# Allegro board u-board-dvt-0513.brd
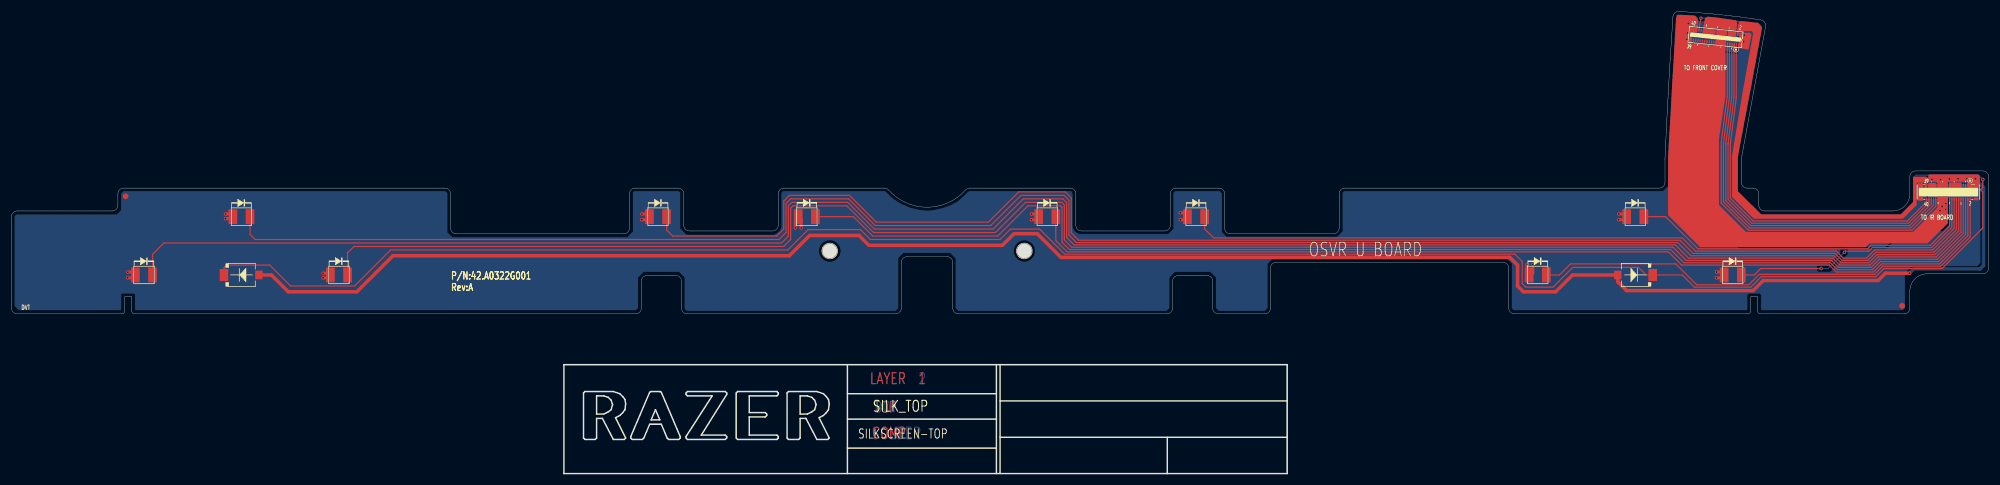
[diagram p0: board, top side]
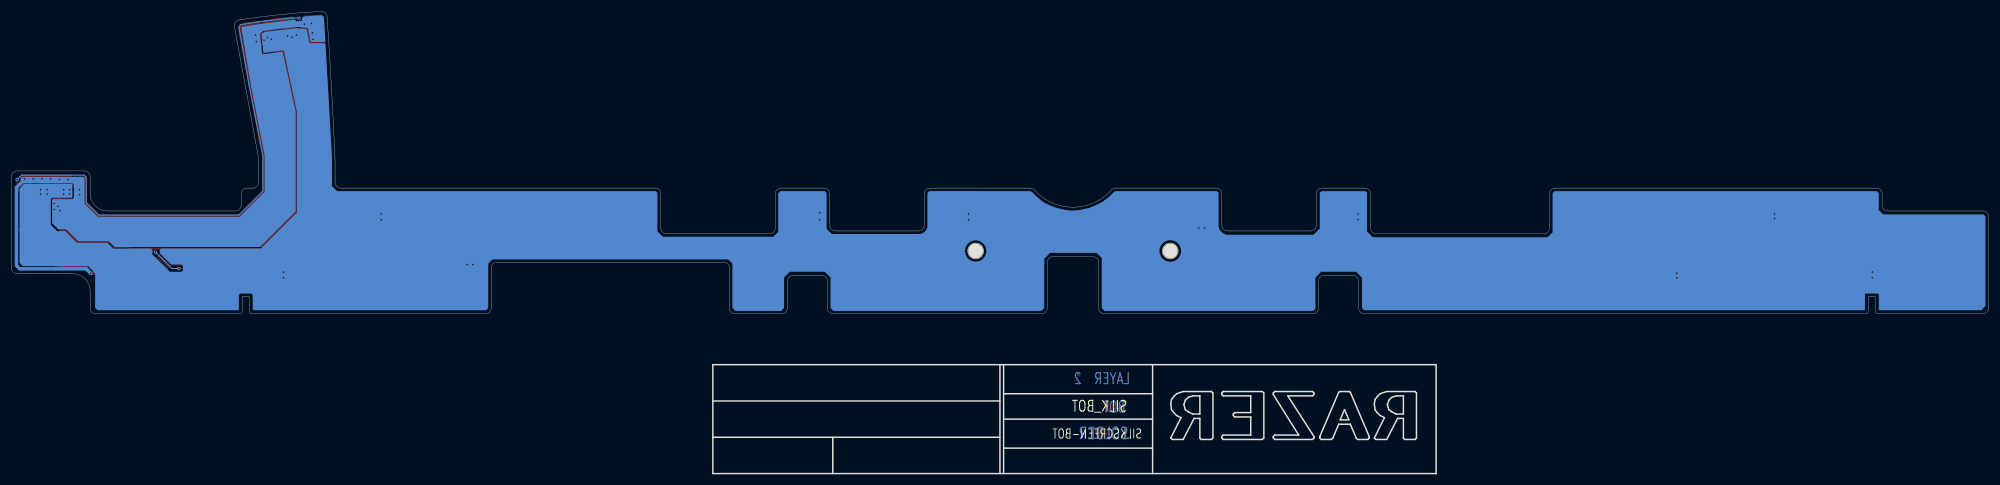
[diagram p1: board, bottom side, seen from below]

Outline 345.43 x 80.84 mm; copper layers: TOP, BOTTOM. Coordinates in mm from the lower left corner of the outline.
Outline path: 0,44.94 0,28.94 arc(0.29,28.23) 1,27.94 19.3,27.94 arc(19.65,28.09) 19.8,28.44 19.8,30.94 21,30.94 21,28.44 arc(21.15,28.09) 21.5,27.94 109.06,27.94 arc(109.76,28.23) 110.06,28.94 110.06,33.65 arc(110.35,34.36) 111.06,34.65 116.07,34.65 arc(116.77,34.36) 117.07,33.65 117.07,28.94 arc(117.36,28.23) 118.07,27.94 154.47,27.94 arc(155.17,28.23) 155.47,28.94 155.47,36.94 arc(155.76,37.65) 156.47,37.94 163.47,37.94 arc(164.17,37.65) 164.47,36.94 164.47,28.94 arc(164.76,28.23) 165.47,27.94 201.87,27.94 arc(202.57,28.23) 202.87,28.94 202.87,33.65 arc(203.16,34.36) 203.87,34.65 208.88,34.65 arc(209.58,34.36) 209.88,33.65 209.88,28.94 arc(210.17,28.23) 210.88,27.94 218.97,27.94 arc(219.67,28.23) 219.97,28.94 219.97,35.94 arc(220.26,36.65) 220.97,36.94 260.61,36.94 arc(261.31,36.65) 261.61,35.94 261.61,28.94 arc(261.9,28.23) 262.61,27.94 303.38,27.94 arc(303.73,28.09) 303.88,28.44 303.88,30.94 305.08,30.94 305.08,28.44 arc(305.22,28.09) 305.58,27.94 330.68,27.94 arc(331.39,28.23) 331.68,28.94 331.68,31.94 arc(332.56,34.06) 334.68,34.94 344.43,34.94 arc(345.13,35.23) 345.43,35.94 345.43,51.94 arc(345.13,52.65) 344.43,52.94 332.68,52.94 arc(331.97,52.65) 331.68,51.94 331.68,48.94 arc(330.8,46.82) 328.68,45.94 306.29,45.94 arc(305.58,46.23) 305.29,46.94 305.29,48.94 arc(304.99,49.65) 304.29,49.94 303.24,49.94 arc(302.54,50.23) 302.25,50.94 302.25,55.04 302.34,55.66 306.47,78.19 arc(306.3,78.95) 305.64,79.36 arc(298.51,80.28) 291.34,80.84 arc(290.62,80.59) 290.29,79.91 arc(289.53,67.79) 288.92,55.66 288.89,55.04 288.89,50.94 arc(288.6,50.23) 287.89,49.94 232.97,49.94 arc(232.26,49.65) 231.97,48.94 231.97,42.94 arc(231.67,42.23) 230.97,41.94 212.97,41.94 arc(212.26,42.23) 211.97,42.94 211.97,48.94 arc(211.67,49.65) 210.97,49.94 203.47,49.94 arc(202.76,49.65) 202.47,48.94 202.47,43.44 arc(202.17,42.73) 201.47,42.44 186.97,42.44 arc(186.26,42.73) 185.97,43.44 185.97,48.94 arc(185.67,49.65) 184.97,49.94 167.43,49.94 arc(167.03,49.85) 166.69,49.6 arc(159.97,46.59) 153.24,49.6 arc(152.91,49.85) 152.5,49.94 134.97,49.94 arc(134.26,49.65) 133.97,48.94 133.97,43.44 arc(133.67,42.73) 132.97,42.44 118.47,42.44 arc(117.76,42.73) 117.47,43.44 117.47,48.94 arc(117.17,49.65) 116.47,49.94 108.97,49.94 arc(108.26,49.65) 107.97,48.94 107.97,42.94 arc(107.67,42.23) 106.97,41.94 77.72,41.94 arc(77.02,42.23) 76.73,42.94 76.73,48.94 arc(76.43,49.65) 75.73,49.94 19.6,49.94 arc(18.89,49.65) 18.6,48.94 18.6,46.94 arc(18.31,46.23) 17.6,45.94 1,45.94 arc(0.29,45.65) 0,44.94

## Placement (name value [footprint] x y rotation side)
FPC  TP_1mm  [TPC30T]  125.6 45.72 0 top
LED7  SFH 4253  [OSRAM_SFH4253]  283.7 44.94 90 top
LED8  SFH 4253  [OSRAM_SFH4253]  300.73 34.74 90 top
LED9  SFH 4253  [OSRAM_SFH4253]  206.97 44.94 90 top
LED10  SFH 4253  [OSRAM_SFH4253]  112.97 44.94 90 top
LED11  SFH 4253  [OSRAM_SFH4253]  40.18 44.94 90 top
LED12  SFH 4253  [OSRAM_SFH4253]  23.15 34.74 90 top
LED13  SFH 4253  [OSRAM_SFH4253]  57.22 34.74 90 top
LED14  SFH 4253  [OSRAM_SFH4253]  138.97 44.94 90 top
LED15  SFH 4253  [OSRAM_SFH4253]  180.97 44.94 90 top
LED16  SFH 4253  [OSRAM_SFH4253]  266.67 34.74 90 top
LED42  BPW34S-Z  [BPW34S]  283.7 34.74 0 top
LED43  BPW34S-Z  [BPW34S]  40.18 34.74 180 top
M1  HOLEC47040N_NPTH  [HOLEC98D98N]  176.97 38.94 0 top
M2  HOLEC47040N_NPTH  [HOLEC98D98N]  142.97 38.94 0 top
NOREF  -  [unnamed]  19.94 48.51 0 top
NOREF#2  -  [#2]  96.52 0 0 top
NOREF#3  -  [unnamed]  330.33 29.34 0 top
P200  JAE-WP7B-S040VA1  [JAE_WP7B-SXXXVA1]  338.41 49.25 0 top
P201  JAE-WP7B-P040VA1  [JAE_WP7B-PXXXVA1]  297.72 76.36 174 top

## Library data of the parts
FPC = T POINT R
LED7-LED16 = LED55BF/TO_3
LED42 LED43 = LED55BF/TO_1
M1 M2 = Mounting Hole
P200 P201 = CON34_0

## Footprints (pads in the part's own frame, mm; a bottom-side part is the same pattern mirrored in y, then rotated)
BPW34S
  rect 1.295x1.499 smd: A(-3.05,0)
  rect 1.499x2.108 smd: C(3.05,0)
HOLEC98D98N
  round 2.489 hole 2.489 unplated: (0,0)
JAE_WP7B-PXXXVA1
  rect 0.229x0.533 smd: 1(-3.8,0.925) 2(-3.8,-0.925) 3(-3.4,0.925) 4(-3.4,-0.925) 5(-3,0.925) 6(-3,-0.925) 7(-2.6,0.925) 8(-2.6,-0.925) 9(-2.2,0.925) 10(-2.2,-0.925) 11(-1.8,0.925) 12(-1.8,-0.925) 13(-1.4,0.925) 14(-1.4,-0.925) 15(-1,0.925) 16(-1,-0.925) 17(-0.6,0.925) 18(-0.6,-0.925) 19(-0.2,0.925) 20(-0.2,-0.925) 21(0.2,0.925) 22(0.2,-0.925) 23(0.6,0.925) 24(0.6,-0.925) 25(1,0.925) 26(1,-0.925) 27(1.4,0.925) 28(1.4,-0.925) 29(1.8,0.925) 30(1.8,-0.925) 31(2.2,0.925) 32(2.2,-0.925) 33(2.6,0.925) 34(2.6,-0.925) 35(3,0.925) 36(3,-0.925) 37(3.4,0.925) 38(3.4,-0.925) 39(3.8,0.925) 40(3.8,-0.925) S1(-4.2,0.925) S2(-4.2,-0.925) S3(4.2,0.925) S4(4.2,-0.925)
JAE_WP7B-SXXXVA1
  rect 0.229x0.533 smd: 1(3.8,1.2) 2(3.8,-1.2) 3(3.4,1.2) 4(3.4,-1.2) 5(3,1.2) 6(3,-1.2) 7(2.6,1.2) 8(2.6,-1.2) 9(2.2,1.2) 10(2.2,-1.2) 11(1.8,1.2) 12(1.8,-1.2) 13(1.4,1.2) 14(1.4,-1.2) 15(1,1.2) 16(1,-1.2) 17(0.6,1.2) 18(0.6,-1.2) 19(0.2,1.2) 20(0.2,-1.2) 21(-0.2,1.2) 22(-0.2,-1.2) 23(-0.6,1.2) 24(-0.6,-1.2) 25(-1,1.2) 26(-1,-1.2) 27(-1.4,1.2) 28(-1.4,-1.2) 29(-1.8,1.2) 30(-1.8,-1.2) 31(-2.2,1.2) 32(-2.2,-1.2) 33(-2.6,1.2) 34(-2.6,-1.2) 35(-3,1.2) 36(-3,-1.2) 37(-3.4,1.2) 38(-3.4,-1.2) 39(-3.8,1.2) 40(-3.8,-1.2)
  rect 0.762x0.508 smd: S1(-4.85,1.2) S2(-4.85,-1.2) S3(4.85,1.2) S4(4.85,-1.2)
OSRAM_SFH4253
  rect 2.591x1.524 smd: A(0,1.5) C(0,-1.5)
TPC30T
  round 0 smd: 1(0,0)
unnamed
  round 1.016 smd: 1(0,0)

## Nets
2.8V_FPC_U: LED7.A(ANODE) LED8.A(ANODE) LED9.A(ANODE) LED10.A(ANODE) LED11.A(ANODE) LED12.A(ANODE) LED13.A(ANODE) LED14.A(ANODE) LED15.A(ANODE) LED16.A(ANODE) P200.9 P200.11 P200.13 P200.15 P200.17 P200.19 P200.31 P200.33 P200.35 P200.37 P201.4 P201.6 P201.8 P201.10 P201.22 P201.24 P201.26 P201.28 P201.30 P201.32
3.3V_FPC_U: P200.39 P201.2
DGND_FPC_U: LED42.A(ANODE) LED43.A(ANODE) P200.1 P200.3 P200.21 P200.22 P200.23 P200.24 P200.25 P200.26 P200.27 P200.28 P200.29 P200.30 P200.S1 P200.S2 P200.S3 P201.11 P201.12 P201.13 P201.14 P201.15 P201.16 P201.17 P201.18 P201.19 P201.20 P201.38 P201.40 P201.S1 P201.S2 P201.S3 P201.S4
DRVCLK_FPC_U: P200.36 P201.5
IR_LED_IN_U: LED42.C(CATHODE) LED43.C(CATHODE) P200.5 P201.36
LATEN_FPC_U: P200.40 P201.1
LED7: LED7.C(CATHODE) P200.20
LED8: LED8.C(CATHODE) P200.18
LED9: LED9.C(CATHODE) P200.16
LED10: LED10.C(CATHODE) P200.14
LED11: LED11.C(CATHODE) P200.12
LED12: LED12.C(CATHODE) P200.10
LED13: LED13.C(CATHODE) P200.8
LED14: LED14.C(CATHODE) P200.6
LED15: LED15.C(CATHODE) P200.4
LED16: LED16.C(CATHODE) P200.2
OUTEN_FPC_U: P200.38 P201.3
SDI_FPC_U: P200.34 P201.7
SDO_FPC_U: P200.32 P201.9

Pads without a net: FPC 1; NOREF 1; NOREF#3 1; P200 7 S4; P201 21 23 25 27 29 31 33 34 35 37 39

## Via types
v1: diameter 0.61, hole 0.305, TOP to BOTTOM, 57 vias

## Routing (per net, layer and track width the routed paths; a pad name or vN(x,y) marks a point on that pad's centre or on a via; arc(x,y) is an arc through that point)
2.8V_FPC_U: length 32.8
  TOP w0.508: v1(20.32,34.24) 21.15,34.24 LED12.A 21.14,35.26 v1(20.32,35.26) ; v1(280.82,45.42) 281.72,45.42 LED7.A 281.66,44.4 v1(280.82,44.4) ; v1(37.39,45.42) 38.21,45.42 LED11.A 38.35,44.6 v1(37.39,44.6) ; v1(265.81,36.58) 265.81,35.05 265.5,34.74 LED16.A 264.8,35.11 v1(264.8,36.58) ; v1(110.13,44.4) 110.92,44.4 LED10.A 110.99,45.42 v1(110.13,45.42) ; v1(204.22,45.62) 204.79,45.62 LED9.A 204.92,44.4 v1(204.22,44.4) ; v1(297.89,35.26) 298.72,35.26 LED8.A 298.73,34.24 v1(297.89,34.24) ; v1(178.21,44.4) 178.92,44.4 LED15.A 178.99,45.42 v1(178.21,45.42) ; v1(136.96,42.98) 136.96,44.43 LED14.A 137.97,44.43 v1(137.97,42.98) ; v1(54.46,34.24) 55.21,34.24 LED13.A 55.4,35.05 v1(54.46,35.05)
  vias: v1(295.66,76.71) v1(296.42,76.33) v1(297.18,76.58) v1(300,75.98) v1(300.69,76.26) v1(301.3,75.82) v1(335.28,49.66) v1(335.28,48.89) v1(336.3,49.66) v1(336.3,48.89) v1(339.22,49.66) v1(339.22,48.89) v1(340.36,49.66) v1(340.36,48.89)
3.3V_FPC_U: length 4.2
  TOP w0.203: P200.39 334.61,50.83 334.39,51.05 332.74,51.05 332.61,50.93
  TOP w0.229: P201.2 301.7,77.85 302.39,77.85
DGND_FPC_U: length 334.8
  TOP w0.61: v1(331.6,35.05) 327.41,35.05 326.14,33.78 306.07,33.78 304.29,32 282.2,32 280.65,33.56 LED42.A 272.74,34.74 269.8,31.8 264.16,31.8 263.14,32.82 263.14,36.47 261.8,37.82 183.36,37.82 179.22,41.96 175.16,41.96 173.13,39.93 149.81,39.93 148.08,41.66 139.45,41.66 135.89,38.1 66.65,38.1 60.35,31.8 48.36,31.8 45.42,34.74 LED43.A
  BOTTOM w0.61: 343.28,51.31 344.55,50.04 344.55,36.4 343.97,35.81 332.36,35.81 v1(331.6,35.05)
  vias: v1(292.74,75.95) v1(292.86,77.09) v1(292.99,78.74) v1(294.26,78.61) v1(302.64,75.56) v1(302.77,76.71) v1(333.5,49.66) v1(333.5,48.77) v1(335.53,51.44) v1(336.93,45.97) v1(337.06,51.44) v1(337.31,46.74) v1(337.95,47.24) v1(337.95,46.23) v1(338.58,51.56) v1(340.11,51.56) v1(341.63,51.56) v1(343.15,51.56)
DRVCLK_FPC_U: length 67.6
  TOP w0.203: P200.36 335.41,47.17 331.62,43.38 303.89,43.38 299.51,47.76 299.51,57.49 299.52,57.74 300.56,65.85 300.56,74.63 P201.5
IR_LED_IN_U: length 434
  TOP w0.203: P201.36 294.89,78.08 v1(295.18,79.67) ; 344.04,49.66 344.42,50.04 v1(344.42,51.44) ; 344.04,49.66 344.42,49.28 344.42,42.98 337.31,35.86 327.15,35.86 325.73,34.44 305.71,34.44 303.89,32.61 294.03,32.61 291.9,34.74 LED42.C 285.6,34.74 284.28,36.07 272.8,36.07 269.34,32.61 264.57,32.61 263.96,33.22 263.96,37.08 262.66,38.38 184.02,38.38 179.63,42.77 174.55,42.77 172.72,40.94 150.06,40.94 148.34,42.67 139.19,42.67 135.64,39.12 66.24,39.12 59.94,32.82 48.77,32.82 45.11,36.47 37.59,36.47 37.13,36.02 LED43.C ; 344.04,49.66 341.63,49.66 341.41,49.88 P200.5
  BOTTOM w0.203: v1(295.18,79.67) 296.45,79.69 296.83,79.67 302.29,79.03 304.58,78.65 305.44,78.49 305.69,78.11 303.91,67.95 301.5,55.63 301.5,49.4 305.69,45.21 330.2,45.21 332.36,47.37 332.36,51.82 332.74,52.2 343.66,52.2 v1(344.42,51.44)
LATEN_FPC_U: length 64.8
  TOP w0.203: P200.40 334.61,47.56 331.25,44.2 304.29,44.2 300.31,48.18 300.31,57.63 300.31,57.63 301.35,65.8 301.35,74.55 P201.1
LED7: length 62.1
  TOP w0.203: P200.20 338.61,43.28 335.25,39.93 324.92,39.93 324.31,39.32 294.64,39.32 289.02,44.94 LED7.C
LED8: length 45.2
  TOP w0.203: P200.18 339.01,43.08 335.46,39.52 325.12,39.52 324.51,38.91 320.45,38.91 v1(320.24,38.71) ; LED8.C 304.49,34.74 305.61,35.86 v1(316.18,35.86)
  BOTTOM w0.203: v1(320.24,38.71) 317.4,35.86 v1(316.18,35.86)
LED9: length 142.5
  TOP w0.203: P200.16 339.41,42.87 335.66,39.12 325.53,39.12 324.1,37.69 320.04,37.69 318.82,38.91 294.23,38.91 291.92,41.22 210.03,41.22 208.47,42.79 LED9.C
LED10: length 254.2
  TOP w0.203: P200.14 339.81,42.66 335.86,38.71 325.73,38.71 324.31,37.29 319.84,37.29 318.62,38.51 293.83,38.51 291.52,40.82 186.46,40.82 185.17,42.11 185.17,48.21 184.1,49.28 175.97,49.28 170.69,43.99 151.08,43.99 146.41,48.67 135.94,48.67 134.93,47.65 134.93,42.77 133.71,41.55 115.52,41.55 114.47,42.61 LED10.C
LED11: length 328.4
  TOP w0.203: P200.12 340.21,42.45 336.07,38.3 325.93,38.3 324.51,36.88 319.63,36.88 318.41,38.1 293.42,38.1 291.11,40.41 186.06,40.41 184.76,41.71 184.76,47.8 183.9,48.67 176.38,48.67 171.09,43.38 150.93,43.38 146.25,48.06 136.14,48.06 135.33,47.24 135.33,42.16 134.11,40.94 42.57,40.94 41.68,41.83 LED11.C
LED12: length 347.1
  TOP w0.203: P200.10 340.61,42.24 336.27,37.9 326.14,37.9 324.71,36.47 319.43,36.47 318.21,37.69 293.01,37.69 290.7,40.01 185.65,40.01 184.35,41.3 184.35,47.4 183.69,48.06 176.78,48.06 171.5,42.77 150.77,42.77 146.1,47.45 136.35,47.45 135.74,46.84 135.74,41.55 134.52,40.34 26.62,40.34 24.65,38.37 LED12.C
LED13: length 313.7
  TOP w0.203: LED13.C 58.72,38.6 59.84,39.73 134.93,39.73 136.14,40.94 136.14,46.43 136.55,46.84 145.95,46.84 150.62,42.16 171.91,42.16 177.19,47.45 183.49,47.45 183.95,46.99 183.95,40.89 185.24,39.6 290.3,39.6 292.61,37.29 318.01,37.29 319.23,36.07 324.92,36.07 326.34,37.49 336.47,37.49 341.01,42.03 P200.8
LED14: length 221.5
  TOP w0.203: P200.6 341.41,41.82 336.68,37.08 326.54,37.08 325.12,35.66 319.02,35.66 317.81,36.88 292.2,36.88 289.89,39.19 184.84,39.19 183.54,40.49 183.54,46.58 183.29,46.84 177.6,46.84 172.31,41.55 150.47,41.55 147.08,44.94 LED14.C
LED15: length 174.9
  TOP w0.203: P200.4 341.81,41.61 336.88,36.68 326.75,36.68 325.32,35.26 318.82,35.26 317.6,36.47 291.8,36.47 289.48,38.79 184.43,38.79 182.47,40.75 LED15.C
LED16: length 86.5
  TOP w0.203: LED16.C 270.45,34.74 272.39,36.68 290.78,36.68 294.44,33.02 303.53,33.02 305.36,34.85 325.53,34.85 326.95,36.27 337.08,36.27 342.21,41.4 P200.2
OUTEN_FPC_U: length 66.2
  TOP w0.203: P201.3 300.95,74.59 300.95,65.82 299.91,57.68 299.91,57.68 299.91,47.97 304.09,43.79 331.42,43.79 335.01,47.38 P200.38
SDI_FPC_U: length 69
  TOP w0.203: P200.34 335.81,46.96 331.83,42.98 303.68,42.98 299.11,47.55 299.11,57.48 299.12,57.79 300.16,65.87 300.16,74.67 300.16,74.67 P201.7
SDO_FPC_U: length 70.4
  TOP w0.203: P200.32 336.21,46.75 332.03,42.57 303.48,42.57 298.71,47.34 298.71,57.2 298.73,57.96 299.76,65.9 299.76,74.71 P201.9

## Copper pours and planes (outline as drawn; the poured copper is in the pictures)
2.8V_FPC_U on TOP (solid shape): 336.32,50.72 336.32,50.14 336.73,49.73 336.73,48.82 336.42,48.51 335,48.51 334.9,48.62 334.9,50.72 335,50.83 336.22,50.83
2.8V_FPC_U on TOP (solid shape): 340.72,50.83 340.72,48.64 340.64,48.56 338.96,48.56 338.89,48.64 338.89,49.78 338.51,50.17 338.51,50.85 338.58,50.93 340.61,50.93
2.8V_FPC_U on TOP (solid shape): 297.85,79.79 301.27,79.29 301.53,79.03 301.35,77.32 301.29,76.64 301.27,76.5 301.28,76.49 301.53,76.11 301.53,75.62 301.42,75.54 301.28,75.54 299.75,75.7 299.64,75.85 299.75,76.49 299.84,76.6 299.86,76.73 299.87,76.81 299.93,77.38 299.92,77.39 299.75,77.66 298.12,77.91 298,77.94 297.79,77.74 297.78,77.73 297.7,77 297.61,76.02 297.52,75.93 297.08,75.98 296.37,76.02 296.21,76.06 295.63,76.26 295.2,76.52 295.2,76.81 295.4,77.09 295.47,77.16 295.49,77.25 295.55,77.84 295.56,77.89 295.9,79.71 296.32,79.92 296.45,79.92
2.8V_FPC_U on BOTTOM (solid shape): 299.74,77.45 299.94,77.41 301.01,77.28 301.27,77.25 301.69,76.94 301.75,76.91 301.75,76.9 301.78,76.87 301.66,75.73 301.4,73.65 301.36,73.61 301.27,73.61 301.03,73.63 297.92,74.04 297.87,74.02 297.84,73.96 295.58,63.42 295.53,63.22 295.53,45.72 301.88,39.37 319.28,39.37 319.53,39.12 319.53,38.61 317.5,36.58 315.72,36.58 315.47,36.32 315.47,35.56 315.72,35.31 317.75,35.31 320.8,38.35 320.8,39.12 321.06,39.37 327.66,39.37 328.68,40.39 334.01,40.39 336.04,42.42 337.44,42.42 338.58,43.56 338.58,48.01 338.33,48.26 334.9,48.26 334.77,48.39 334.77,50.55 334.9,50.67 343.21,50.67 344.02,49.86 344.02,36.88 343.41,36.27 332.03,36.27 330.81,35.05 330.81,28.98 330.4,28.58 305.82,28.58 305.69,28.7 305.69,31.24 305.44,31.5 303.53,31.5 303.28,31.24 303.28,28.7 303.15,28.58 262.51,28.58 262.13,28.96 262.13,36.7 261.37,37.47 220.22,37.47 219.46,36.7 219.46,28.96 218.95,28.45 210.95,28.45 210.44,28.96 210.44,34.29 209.42,35.31 203.33,35.31 202.31,34.29 202.31,28.96 201.8,28.45 165.48,28.45 164.97,28.96 164.97,37.59 163.96,38.61 155.83,38.61 154.94,37.72 154.94,28.96 154.43,28.45 118.08,28.45 117.94,28.49 117.64,28.79 117.6,28.91 117.6,34.29 116.59,35.31 110.49,35.31 109.47,34.29 109.47,28.96 109.09,28.58 21.72,28.58 21.59,28.7 21.59,31.37 21.46,31.5 19.3,31.5 19.18,31.37 19.18,28.7 19.05,28.58 1.27,28.58 0.53,29.31 0.53,39 141.09,39 141.09,38.87 141.1,38.75 141.11,38.63 141.14,38.51 141.17,38.39 141.21,38.27 141.25,38.16 141.31,38.05 141.37,37.94 141.44,37.84 141.51,37.74 141.59,37.65 141.68,37.56 141.77,37.48 141.87,37.41 141.97,37.34 142.08,37.28 142.19,37.22 142.3,37.18 142.42,37.14 142.54,37.11 142.66,37.08 142.78,37.07 142.91,37.06 143.03,37.06 143.15,37.07 143.27,37.08 143.39,37.11 143.51,37.14 143.63,37.18 143.74,37.22 143.85,37.28 143.96,37.34 144.06,37.41 144.16,37.48 144.25,37.56 144.34,37.65 144.42,37.74 144.5,37.84 144.56,37.94 144.63,38.05 144.68,38.16 144.73,38.27 144.77,38.39 144.8,38.51 144.82,38.63 144.84,38.75 144.85,38.87 144.85,39 175.11,39 175.11,38.88 175.12,38.75 175.14,38.63 175.16,38.52 175.19,38.4 175.23,38.28 175.28,38.17 175.33,38.06 175.39,37.96 175.46,37.86 175.53,37.76 175.61,37.67 175.7,37.58 175.79,37.5 175.89,37.43 175.99,37.36 176.09,37.3 176.2,37.25 176.31,37.2 176.43,37.16 176.55,37.13 176.67,37.11 176.79,37.09 176.91,37.08 177.03,37.08 177.15,37.09 177.27,37.11 177.39,37.13 177.5,37.16 177.62,37.2 177.73,37.25 177.84,37.3 177.95,37.36 178.05,37.43 178.14,37.5 178.23,37.58 178.32,37.67 178.4,37.76 178.47,37.86 178.54,37.96 178.6,38.06 178.65,38.17 178.7,38.28 178.74,38.4 178.77,38.52 178.8,38.63 178.81,38.75 178.82,38.88 178.82,39 178.81,39.12 178.8,39.24 178.77,39.36 178.74,39.47 178.7,39.59 178.65,39.7 178.6,39.81 178.54,39.91 178.47,40.02 178.4,40.11 178.32,40.2 178.23,40.29 178.14,40.37 178.05,40.44 177.95,40.51 177.84,40.57 177.73,40.62 177.62,40.67 177.5,40.71 177.39,40.74 177.27,40.76 177.15,40.78 177.03,40.79 176.91,40.79 176.79,40.78 176.67,40.76 176.55,40.74 176.43,40.71 176.31,40.67 176.2,40.62 176.09,40.57 175.99,40.51 175.89,40.44 175.79,40.37 175.7,40.29 175.61,40.2 175.53,40.11 175.46,40.02 175.39,39.91 175.33,39.81 175.28,39.7 175.23,39.59 175.19,39.47 175.16,39.36 175.14,39.24 175.12,39.12 175.11,39 144.85,39 144.84,39.12 144.82,39.24 144.8,39.36 144.77,39.48 144.73,39.6 144.68,39.71 144.63,39.82 144.56,39.93 144.5,40.03 144.42,40.13 144.34,40.22 144.25,40.31 144.16,40.39 144.06,40.46 143.96,40.53 143.85,40.59 143.74,40.65 143.63,40.7 143.51,40.74 143.39,40.77 143.27,40.79 143.15,40.81 143.03,40.82 142.91,40.82 142.78,40.81 142.66,40.79 142.54,40.77 142.42,40.74 142.3,40.7 142.19,40.65 142.08,40.59 141.97,40.53 141.87,40.46 141.77,40.39 141.68,40.31 141.59,40.22 141.51,40.13 141.44,40.03 141.37,39.93 141.31,39.82 141.25,39.71 141.21,39.6 141.17,39.48 141.14,39.36 141.11,39.24 141.1,39.12 141.09,39 0.53,39 0.53,44.98 0.89,45.34 18.42,45.34 19.18,46.1 19.18,49.02 19.56,49.4 75.82,49.4 76.17,49.05 76.17,42.19 77.01,41.35 107.59,41.35 108.59,42.34 108.59,49.15 108.84,49.4 116.54,49.4 116.84,49.1 116.84,42.88 117.93,41.78 133.27,41.78 133.86,42.14 134.14,42.39 134.34,42.67 134.44,42.9 134.52,43.23 134.52,48.92 134.54,49.07 134.59,49.2 134.72,49.33 134.8,49.38 134.87,49.4 152.57,49.4 152.71,49.35 153.54,48.51 154.18,48.01 154.69,47.62 155.58,47.12 157.1,46.48 158.75,46.1 160.15,45.97 161.16,46.1 162.81,46.48 164.21,46.99 165.35,47.62 166.5,48.64 167.13,49.28 167.39,49.4 184.99,49.4 185.09,49.38 185.19,49.33 185.29,49.23 185.37,49.07 185.39,48.87 185.39,43.13 185.52,42.77 185.67,42.52 185.88,42.29 186.06,42.16 186.33,42.01 186.66,41.91 202.11,41.91 203,42.8 203,48.95 203.1,49.2 203.23,49.33 203.35,49.4 211.07,49.4 211.46,49.02 211.46,42.29 212.32,41.43 231.62,41.43 232.56,42.37 232.56,49.1 232.87,49.4 288.54,49.4 289.43,50.29 289.43,55.12 289.99,65.2 290.58,75.08 290.78,75.29 293.22,75.29 293.42,75.49 293.83,77.72 295.45,77.93
3.3V_FPC_U on TOP (solid shape): 305.23,78.84 305.56,78.38 305.84,78.03 305.82,77.77 301.9,56.87 301.63,55.25 301.63,49.4 305.69,45.34 330.07,45.34 332.23,47.5 332.23,51.82 332.36,51.94 334.52,51.94 334.72,51.74 334.72,50.11 334.65,50.04 334.39,50.04 334.26,50.17 334.26,50.8 334.14,50.93 332.99,50.93 332.87,50.8 332.87,46.99 330.45,44.58 304.42,44.58 300.61,48.39 300.61,49.02 300.61,49.02 300.61,55.64 302.51,67.06 302.69,67.95 304.3,77.08 303.99,77.39 301.8,77.39 301.75,77.34 301.68,76.61 301.46,76.63 301.52,77.11 301.6,77.85 301.78,78.97 302.03,79.15 302.44,79.15
DGND_FPC_U on TOP (solid shape): 334.01,50.67 334.01,47.88 333.88,47.75 333.12,47.75 332.99,47.88 332.99,50.67 333.12,50.8 333.88,50.8
DGND_FPC_U on TOP (solid shape): 304.04,76.84 303.53,74.3 303.4,74.17 302.54,74.32 302.54,74.32 301.78,74.46 301.66,74.71 301.91,77.13 303.75,77.13
DGND_FPC_U on TOP (solid shape): 291.67,80.26 294.18,80.12 294.64,79.38 294.69,79.3 294.72,79.25 294.59,78.11 294.59,78.08 294.52,77.47 294.52,77.44 294.39,76.58 294.26,76.45 293.85,76.52 293.62,76.43 293.57,76.12 293.5,75.56 293.68,75.29 293.7,75.28 297.44,74.86 297.67,75.07 297.95,77.69 298.04,77.77 298.07,77.77 299.68,77.52 299.75,77.41 299.67,76.67 299.62,76.61 299.59,76.58 299.47,75.79 299.57,75.63 299.57,75.62 299.56,75.5 299.47,74.72 299.47,73.28 299.47,66.04 298.32,58.5 298.32,46.99 303.02,42.29 303.33,42.29 303.35,42.27 332.16,42.27 332.18,42.29 332.23,42.29 336.5,46.56 336.5,48.36 336.93,48.79 336.93,49.73 336.5,50.17 336.5,50.8 336.25,51.05 335.03,51.05 334.9,51.18 334.9,52.2 335.03,52.32 343.66,52.32 343.92,52.07 343.92,50.29 343.66,50.04 341.81,50.04 341.72,50.13 341.72,50.97 341.63,51.05 338.46,51.05 338.32,50.91 338.32,50.13 338.71,49.73 338.71,48.77 338.32,48.37 338.32,43.8 334.77,40.26 324.61,40.26 323.98,39.62 302.01,39.62 295.02,39.62 289.43,45.21 289.43,55.12 289.56,57.74 289.87,62.61 289.97,64.49 290.14,67.92 290.22,69.34 290.28,70.07 290.83,79.63 290.96,80.14 291.08,80.26 291.59,80.26
DGND_FPC_U on BOTTOM (solid shape): 294.44,79.96 294.64,79.76 294.64,79.35 294.84,79.15 295.66,79.15 295.86,79.35 296.27,79.35 298.09,79.15 302.77,78.54 305.21,78.13 305.21,77.72 303.59,67.9 302.82,63.97 301.74,58.47 301.19,55.66 301.19,49.28 305.56,44.91 330.33,44.91 332.66,47.24 332.66,51.69 332.87,51.89 343.54,51.89 343.79,51.64 343.79,50.93 343.66,50.8 334.77,50.8 334.52,50.55 334.52,48.26 334.77,48.01 338.2,48.01 338.33,47.88 338.33,43.81 337.25,42.74 335.85,42.74 333.76,40.64 328.42,40.64 327.41,39.62 302.01,39.62 295.76,45.87 295.76,63.23 295.78,63.32 295.8,63.39 298.03,73.8 301.59,73.34 301.61,73.51 301.98,76.52 301.98,77.01 301.97,77.03 301.41,77.44 296.11,78.06 295.45,78.13 293.62,77.93 293.22,75.69 293.01,75.49 290.78,75.49 290.58,75.69 290.86,79.88 290.98,79.96 291.39,80.16

## Text on the board
Ref Des/Silkscreen Top: DVT | TO FRONT COVER | TO IR BOARD | P/N:42.A0322G001 | Rev:A | OSVR U BOARD
BODY_CENTER: FIGURE | SIZE | 12.0 | 98.0 | DRILL CHART: TOP to BOTTOM | ALL UNITS ARE IN MILS | PLATED | NON-PLATED | QTY | 57 | 2
User.7: 12.50 | (HOLE) | 2- | 2.50 | dia | 3.50
